# EAGLE board bjbj1 (EAGLE 7.7.0)
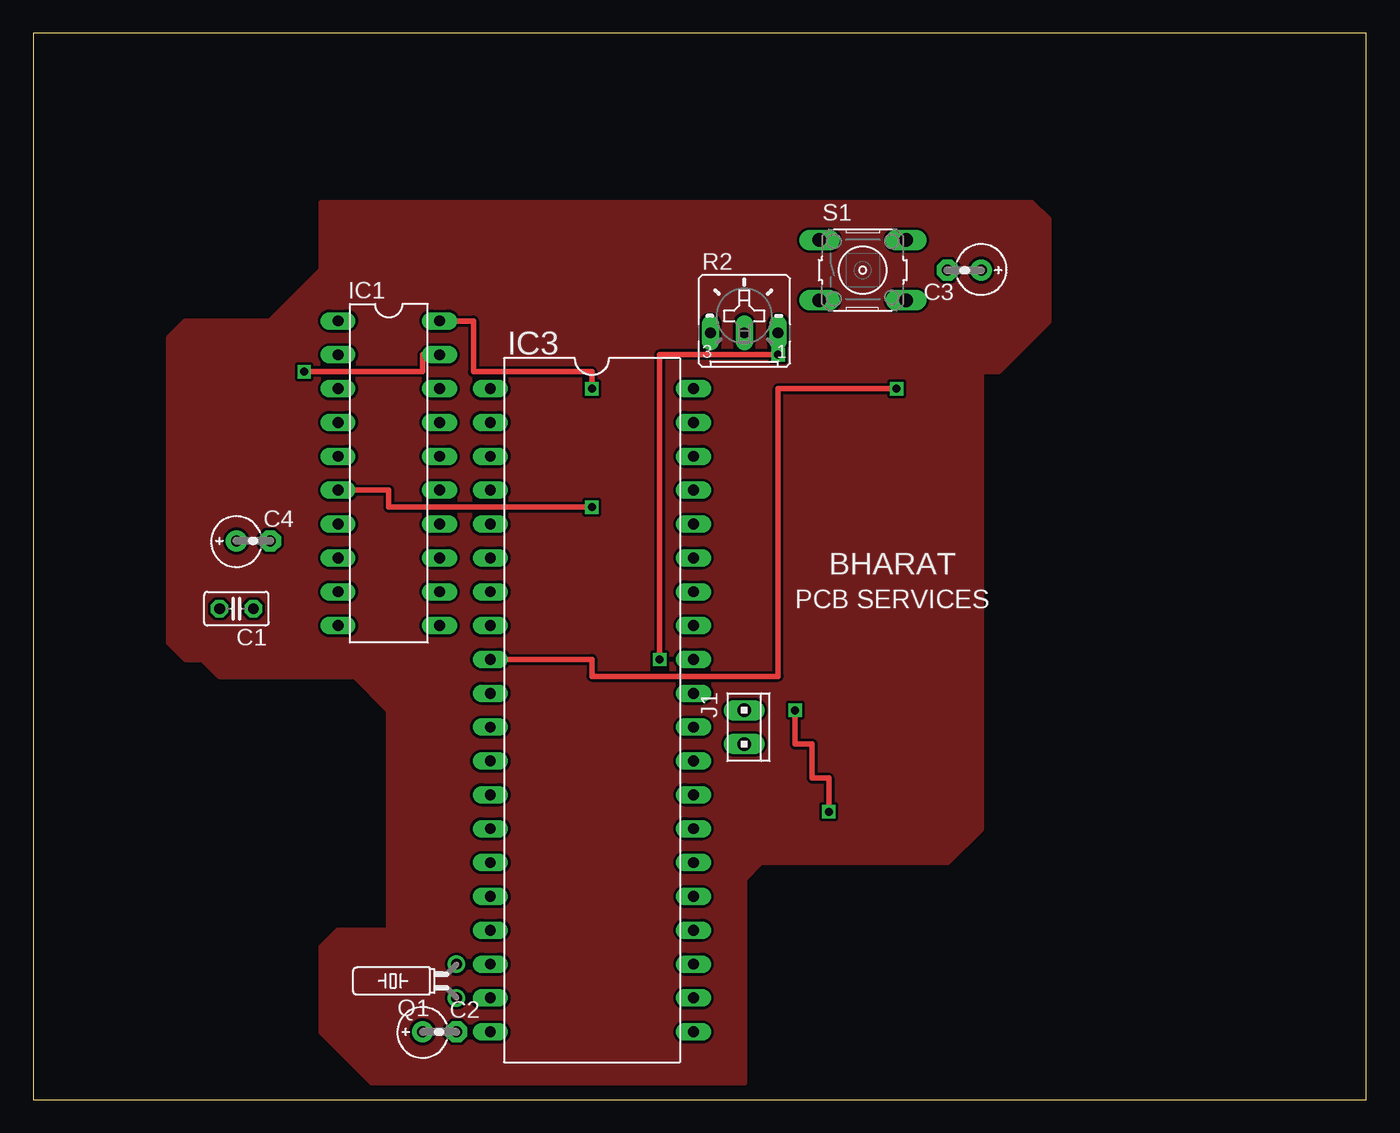
[diagram p0: board, top side]
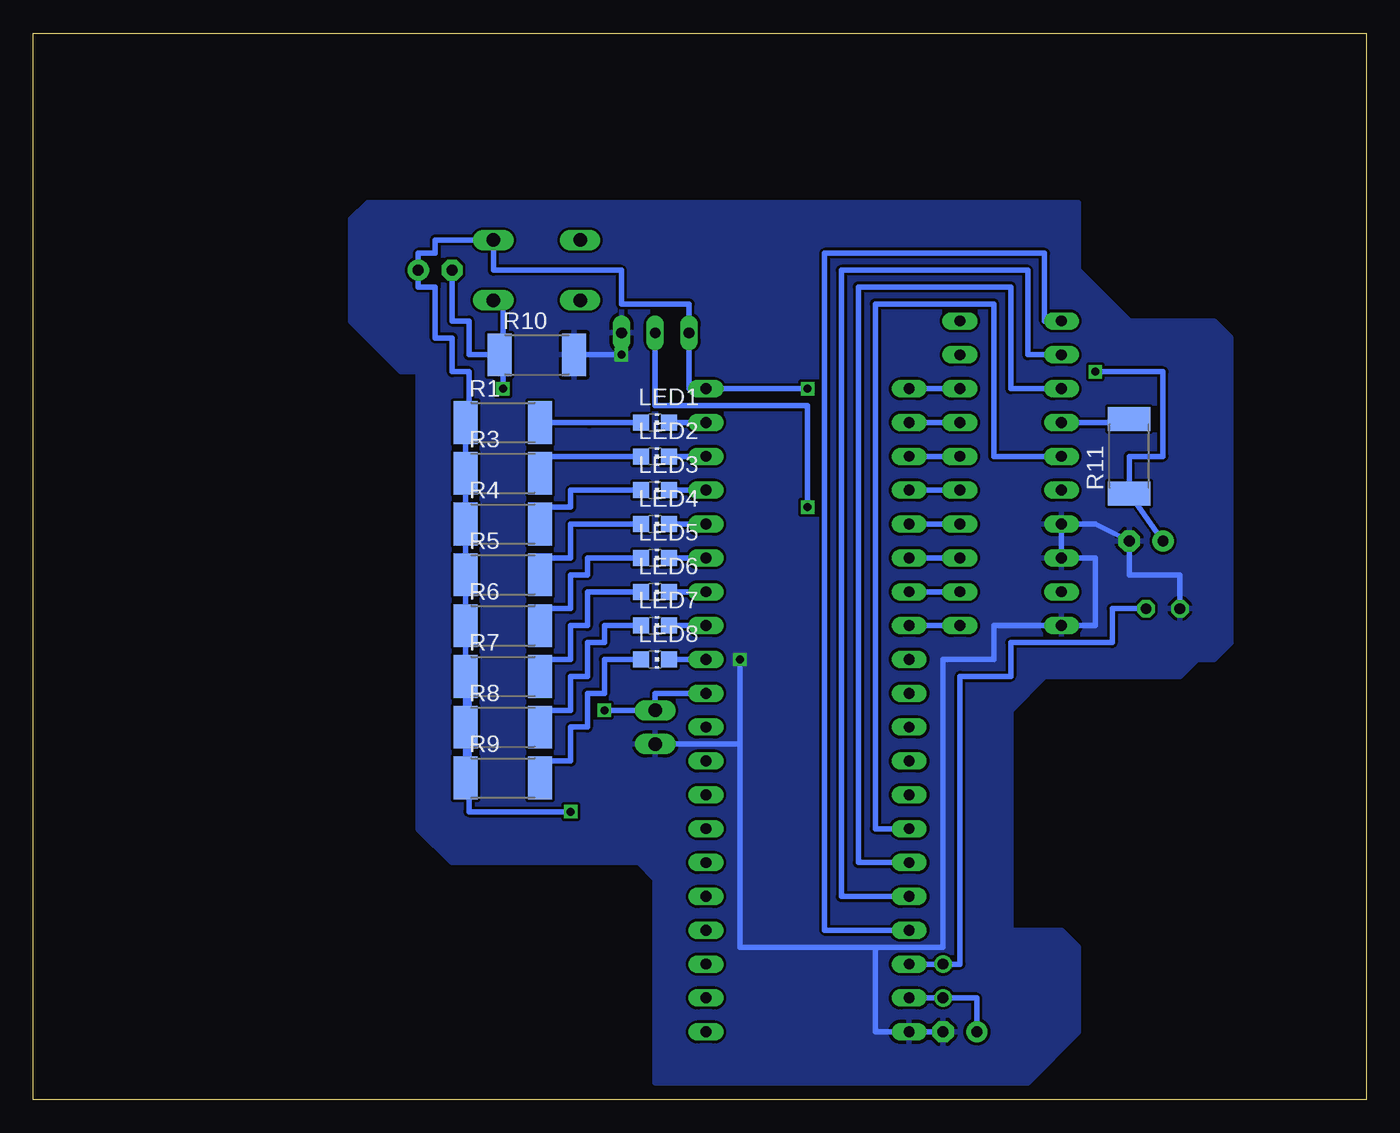
[diagram p1: board, bottom side, seen from below]

Size 100 x 80 mm. Coordinates in mm from the lower left corner, seen from the top.
Outline: 0,0 100,0 100,80 0,80 0,0
Copper layers (1*16): Top 0.035mm / dielectric 1.5mm / Bottom 0.035mm
Design rules "default": minimum track width 10mil, minimum drill 24mil, track to track 8mil, track to pad 8mil, pad to pad 8mil, via to via 8mil, smd to smd 8mil, copper to edge 40mil, drill to drill 8mil, minimum pad ring 10mil, minimum via ring 8mil, stop-mask expansion 4mil, vias tented up to drill 0mil, thermal gap 10mil

## Footprints (pad centres in the part's own frame; a part is rotated, then mirrored left to right if it is on the bottom)
C025-025X050 = drill 0.813 octagon: 1 -1.27,0; 2 1.27,0
E2,5-4R = drill 0.813 pad 1.6: + -1.27,0 | drill 0.813 pad 1.6 octagon: - 1.27,0
DIL20 = drill 0.813 long: 1 -11.43,-3.81; 2 -8.89,-3.81; 3 -6.35,-3.81; 4 -3.81,-3.81; 5 -1.27,-3.81; 6 1.27,-3.81; 7 3.81,-3.81; 8 6.35,-3.81; 9 8.89,-3.81; 10 11.43,-3.81; 11 11.43,3.81; 12 8.89,3.81; 13 6.35,3.81; 14 3.81,3.81; 15 1.27,3.81; 16 -1.27,3.81; 17 -3.81,3.81; 18 -6.35,3.81; 19 -8.89,3.81; 20 -11.43,3.81
DIL40 = drill 0.813 long: 1 -24.13,-7.62; 2 -21.59,-7.62; 3 -19.05,-7.62; 4 -16.51,-7.62; 5 -13.97,-7.62; 6 -11.43,-7.62; 7 -8.89,-7.62; 8 -6.35,-7.62; 9 -3.81,-7.62; 10 -1.27,-7.62; 11 1.27,-7.62; 12 3.81,-7.62; 13 6.35,-7.62; 14 8.89,-7.62; 15 11.43,-7.62; 16 13.97,-7.62; 17 16.51,-7.62; 18 19.05,-7.62; 19 21.59,-7.62; 20 24.13,-7.62; 21 24.13,7.62; 22 21.59,7.62; 23 19.05,7.62; 24 16.51,7.62; 25 13.97,7.62; 26 11.43,7.62; 27 8.89,7.62; 28 6.35,7.62; 29 3.81,7.62; 30 1.27,7.62; 31 -1.27,7.62; 32 -3.81,7.62; 33 -6.35,7.62; 34 -8.89,7.62; 35 -11.43,7.62; 36 -13.97,7.62; 37 -16.51,7.62; 38 -19.05,7.62; 39 -21.59,7.62; 40 -24.13,7.62
10X02MTA = drill 1.016 long: 1 1.27,0; 2 -1.27,0
CHIP-LED0805 = smd 1.2 x 1.2: A 0,-1.05; C 0,1.05
TC26H = drill 0.813: 1 -1.27,0; 2 1.27,0
R2512 = smd 1.8 x 3.2: 1 -2.8,0; 2 2.8,0
B25U = drill 0.813 long: A 2.54,-0.889; E -2.54,-0.889; S 0,-0.889
B3F-10XX = drill 1.016 long: 1 -3.251,2.261; 2 3.251,2.261; 3 -3.251,-2.261; 4 3.251,-2.261

## Placement (x,y rotation side)
C1  [C025-025X050]  15.24,36.83 180 top
C2  [E2,5-4R]  30.48,5.08 0 top
C3  [E2,5-4R]  69.85,62.23 180 top
C4  150pf  [E2,5-4R]  16.51,41.91 0 top
IC1  ADC0801  [DIL20]  26.67,46.99 270 top
IC3  AT89C51-12PC  [DIL40]  41.91,29.21 270 top
J1  [10X02MTA]  53.34,27.94 270 top
LED1  [CHIP-LED0805]  53.34,50.8 270 bottom
LED2  [CHIP-LED0805]  53.34,48.26 270 bottom
LED3  [CHIP-LED0805]  53.34,45.72 270 bottom
LED4  [CHIP-LED0805]  53.34,43.18 270 bottom
LED5  [CHIP-LED0805]  53.34,40.64 270 bottom
LED6  [CHIP-LED0805]  53.34,38.1 270 bottom
LED7  [CHIP-LED0805]  53.34,35.56 270 bottom
LED8  [CHIP-LED0805]  53.34,33.02 270 bottom
Q1  [TC26H]  31.75,8.89 90 top
R1  120R  [R2512]  64.77,50.8 0 bottom
R2  10K  [B25U]  53.34,58.42 0 top
R3  120R  [R2512]  64.77,46.99 0 bottom
R4  120R  [R2512]  64.77,43.18 0 bottom
R5  120R  [R2512]  64.77,39.37 0 bottom
R6  120R  [R2512]  64.77,35.56 0 bottom
R7  120R  [R2512]  64.77,31.75 0 bottom
R8  120R  [R2512]  64.77,27.94 0 bottom
R9  120R  [R2512]  64.77,24.13 0 bottom
R10  8.2k  [R2512]  62.23,55.88 0 bottom
R11  120R  [R2512]  17.78,48.26 90 bottom
S1  [B3F-10XX]  62.23,62.23 0 top

## Library data of the parts
C1-C4 R1 R3-R11 = rcl
IC1 = linear
IC3 = atmel; OC_FARNELL: unknown; OC_NEWARK: unknown
J1 = con-amp
LED1-LED8 = led
Q1 = crystal; OC_FARNELL: unknown; OC_NEWARK: unknown
R2 = pot
S1 = switch-omron; MPN: B3F-1000; OC_FARNELL: 176432; OC_NEWARK: 36M3542

## Nets
GND: C1.2 C2.- C4.- IC1.7 IC1.8 IC1.10 IC3.20 J1.1 R2.A R10.2
N$1: IC3.39 LED1.C
N$2: IC3.32 LED8.C
N$3: IC3.33 LED7.C
N$4: IC3.38 LED2.C
N$5: IC3.37 LED3.C
N$6: IC3.34 LED6.C
N$7: IC3.35 LED5.C
N$8: IC3.36 LED4.C
N$9: LED8.A R9.2
N$10: LED7.A R8.2
N$11: LED6.A R7.2
N$12: LED5.A R6.2
N$13: LED4.A R5.2
N$14: LED3.A R4.2
N$15: LED2.A R3.2
N$16: LED1.A R1.2
N$17: C2.+ IC3.19 Q1.1
N$18: C1.1 IC3.18 Q1.2
N$20: IC1.12 IC3.7
N$21: C3.- IC3.9 R10.1 S1.4
N$22: IC1.13 IC3.6
N$23: IC1.14 IC3.5
N$24: IC1.15 IC3.4
N$25: IC1.16 IC3.3
N$26: IC1.17 IC3.2
N$27: IC1.11 IC3.8
N$28: IC1.18 IC3.1
N$29: IC1.5 IC3.14
N$30: IC1.3 IC3.15
N$31: IC1.2 IC3.16
N$32: IC1.1 IC3.17
N$33: IC1.4 R11.2
N$34: C4.+ IC1.19 R11.1
N$35: IC1.6 R2.S
VCC: C3.+ IC1.20 IC3.31 IC3.40 J1.2 R1.1 R2.E R3.1 R4.1 R5.1 R6.1 R7.1 R8.1 R9.1 S1.2

## Tracks (layer width: path | path; a pad name or v marks a point on that pad's centre or on a via)
GND  (via drill 0.6)
  Top 0.406: v55.88,55.88 46.99,55.88 v46.99,33.02
  Bottom 0.406: C2.- IC3.20 36.83,5.08 36.83,11.43 | R10.2 v55.88,55.88 R2.A | 36.83,11.43 31.75,11.43 31.75,33.02 27.94,33.02 27.94,35.56 IC1.10 20.32,35.56 20.32,40.64 IC1.8 IC1.7 20.32,43.18 C4.- 17.78,39.37 13.97,39.37 C1.2 | 36.83,11.43 46.99,11.43 46.99,26.67 | J1.1 46.99,26.67 | 46.99,26.67 v46.99,33.02
  pour Bottom: 21.59,67.31 74.93,67.31 76.2,66.04 76.2,58.42 72.39,54.61 71.12,54.61 71.12,20.32 68.58,17.78 54.61,17.78 53.34,16.51 53.34,1.27 25.4,1.27 21.59,5.08 21.59,11.43 22.86,12.7 24.13,12.7 26.67,12.7 26.67,29.21 24.13,31.75 13.97,31.75 12.7,33.02 11.43,33.02 10.16,34.29 10.16,53.34 10.16,57.15 11.43,58.42 13.97,58.42 17.78,58.42 21.59,62.23
N$1
  Bottom 0.406: IC3.39 LED1.C
N$2
  Bottom 0.406: IC3.32 LED8.C
N$3
  Bottom 0.406: IC3.33 LED7.C
N$4
  Bottom 0.406: IC3.38 LED2.C
N$5
  Bottom 0.406: IC3.37 LED3.C
N$6
  Bottom 0.406: IC3.34 LED6.C
N$7
  Bottom 0.406: IC3.35 LED5.C
N$8
  Bottom 0.406: IC3.36 LED4.C
N$9
  Bottom 0.406: LED8.A 57.15,33.02 57.15,30.48 58.42,30.48 58.42,27.94 59.69,27.94 59.69,25.4 61.97,25.4 | 62.23,25.4 61.97,25.4 | 61.97,25.4 R9.2
N$10
  Bottom 0.406: LED7.A 57.15,35.56 57.15,34.29 58.42,34.29 58.42,31.75 59.69,31.75 59.69,29.21 61.97,29.21 | 62.23,29.21 61.97,29.21 | 61.97,29.21 R8.2
N$11
  Bottom 0.406: LED6.A 58.42,38.1 58.42,35.56 59.69,35.56 59.69,33.02 61.97,33.02 | 62.23,33.02 61.97,33.02 | 61.97,33.02 R7.2
N$12
  Bottom 0.406: LED5.A 58.42,40.64 58.42,39.37 59.69,39.37 59.69,36.83 61.97,36.83 | 62.23,36.83 61.97,36.83 | 61.97,36.83 R6.2
N$13
  Bottom 0.406: LED4.A 59.69,43.18 59.69,40.64 61.97,40.64 | 62.23,40.64 61.97,40.64 | 61.97,40.64 R5.2
N$14
  Bottom 0.406: LED3.A 59.69,45.72 59.69,44.45 61.97,44.45 | 62.23,44.45 61.97,44.45 | 61.97,44.45 R4.2
N$15
  Bottom 0.406: LED2.A 61.97,48.26 | 62.23,48.26 61.97,48.26 | 61.97,48.26 R3.2
N$16
  Bottom 0.406: LED1.A 58.16,50.8 58.42,50.8 R1.2
N$17
  Bottom 0.406: IC3.19 Q1.1 29.21,7.62 C2.+
N$18
  Bottom 0.406: IC3.18 Q1.2 30.48,10.16 30.48,31.75 26.67,31.75 26.67,34.29 19.05,34.29 19.05,36.83 C1.1
N$19
  pour Top: 24.13,31.75 13.97,31.75 12.7,33.02 11.43,33.02 10.16,34.29 10.16,57.15 11.43,58.42 17.78,58.42 21.59,62.23 21.59,67.31 74.93,67.31 76.2,66.04 76.2,58.42 72.39,54.61 71.12,54.61 71.12,21.59 71.12,20.32 68.58,17.78 54.61,17.78 53.34,16.51 53.34,1.27 25.4,1.27 21.59,5.08 21.59,11.43 22.86,12.7 26.67,12.7 26.67,29.21
N$20
  Bottom 0.406: IC1.12 IC3.7
N$21  (via drill 0.6)
  Top 0.406: IC3.9 41.91,33.02 41.91,31.75 55.88,31.75 55.88,53.34 v64.77,53.34
  Bottom 0.406: 64.77,55.88 R10.1 67.31,55.88 67.31,58.42 68.58,58.42 C3.- | 64.77,55.88 v64.77,53.34 | S1.4 64.77,59.97 64.77,55.88
N$22
  Bottom 0.406: IC1.13 IC3.6
N$23
  Bottom 0.406: IC1.14 IC3.5
N$24
  Bottom 0.406: IC1.15 IC3.4
N$25
  Bottom 0.406: IC1.16 IC3.3
N$26
  Bottom 0.406: IC1.17 IC3.2
N$27
  Bottom 0.406: IC1.11 IC3.8
N$28
  Bottom 0.406: IC3.1 IC1.18
N$29
  Bottom 0.406: IC1.5 27.94,48.26 27.94,59.69 36.83,59.69 36.83,20.32 IC3.14
N$30
  Bottom 0.406: IC1.3 26.67,53.34 26.67,60.96 38.1,60.96 38.1,17.78 IC3.15
N$31
  Bottom 0.406: IC1.2 25.4,55.88 25.4,62.23 39.37,62.23 39.37,15.24 IC3.16
N$32
  Bottom 0.406: IC1.1 24.13,58.42 24.13,63.5 40.64,63.5 40.64,12.7 IC3.17
N$33
  Bottom 0.406: IC1.4 17.78,50.8 R11.2
N$34  (via drill 0.6)
  Top 0.406: IC1.19 29.21,55.88 29.21,54.61 v20.32,54.61
  Bottom 0.406: C4.+ R11.1 17.78,48.26 15.24,48.26 15.24,54.61 v20.32,54.61
N$35  (via drill 0.6)
  Top 0.406: IC1.6 26.67,45.72 26.67,44.45 v41.91,44.45
  Bottom 0.406: R2.S 53.34,52.07 41.91,52.07 v41.91,44.45
VCC  (via drill 0.6)
  Top 0.406: IC1.20 33.02,58.42 33.02,54.61 41.91,54.61 v41.91,53.34 | v57.15,29.21 57.15,26.67 58.42,26.67 58.42,24.13 59.69,24.13 v59.69,21.59
  Bottom 0.406: R7.1 R6.1 R5.1 R4.1 R3.1 R1.1 67.31,50.8 67.31,54.61 68.58,54.61 68.58,57.15 69.85,57.15 69.85,60.96 71.12,60.96 C3.+ 71.12,63.5 69.85,63.5 69.85,64.49 S1.2 65.48,62.23 55.88,62.23 55.88,59.69 50.8,59.69 R2.E 50.8,53.34 IC3.40 v41.91,53.34 | R7.1 R8.1 R9.1 | IC3.31 53.34,30.48 J1.2 v57.15,29.21 | R7.1 67.31,31.75 67.31,21.59 v59.69,21.59

## Text on the board
tPlace: BHARAT | PCB SERVICES